# EAGLE board 1TTR4--- Cumbo.Fabio --- LED Simple (EAGLE 7.7.0)
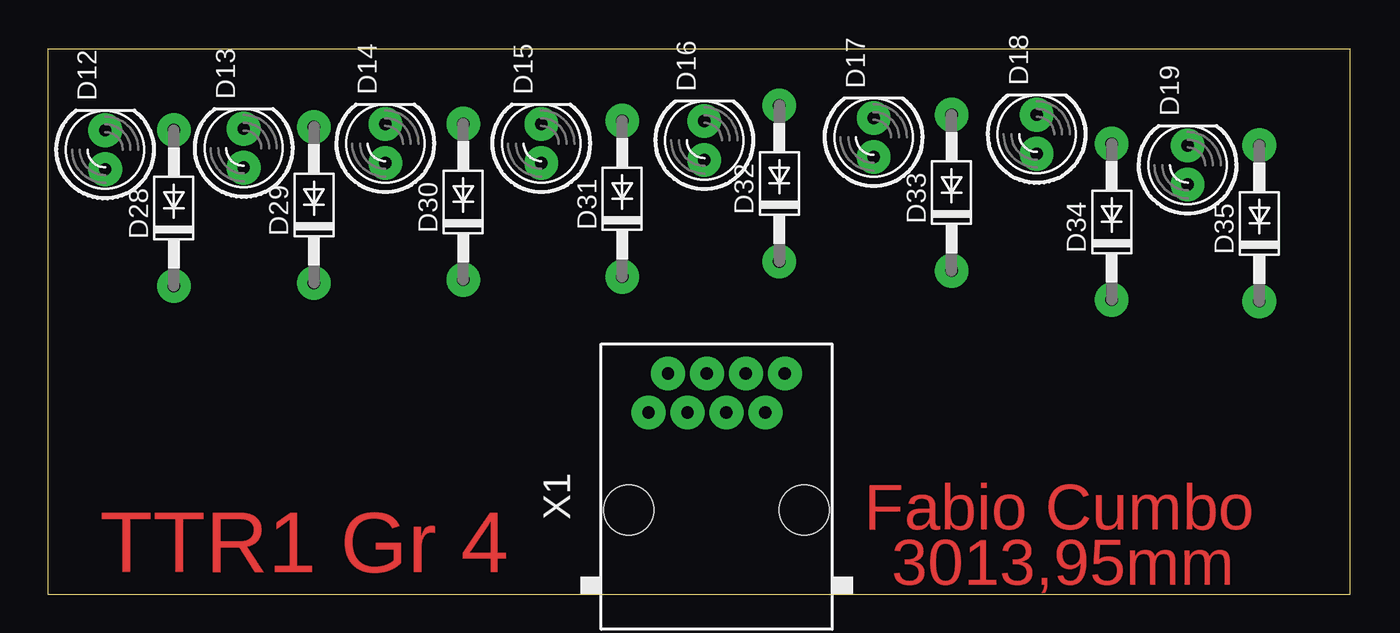
[diagram p0: board, top side]
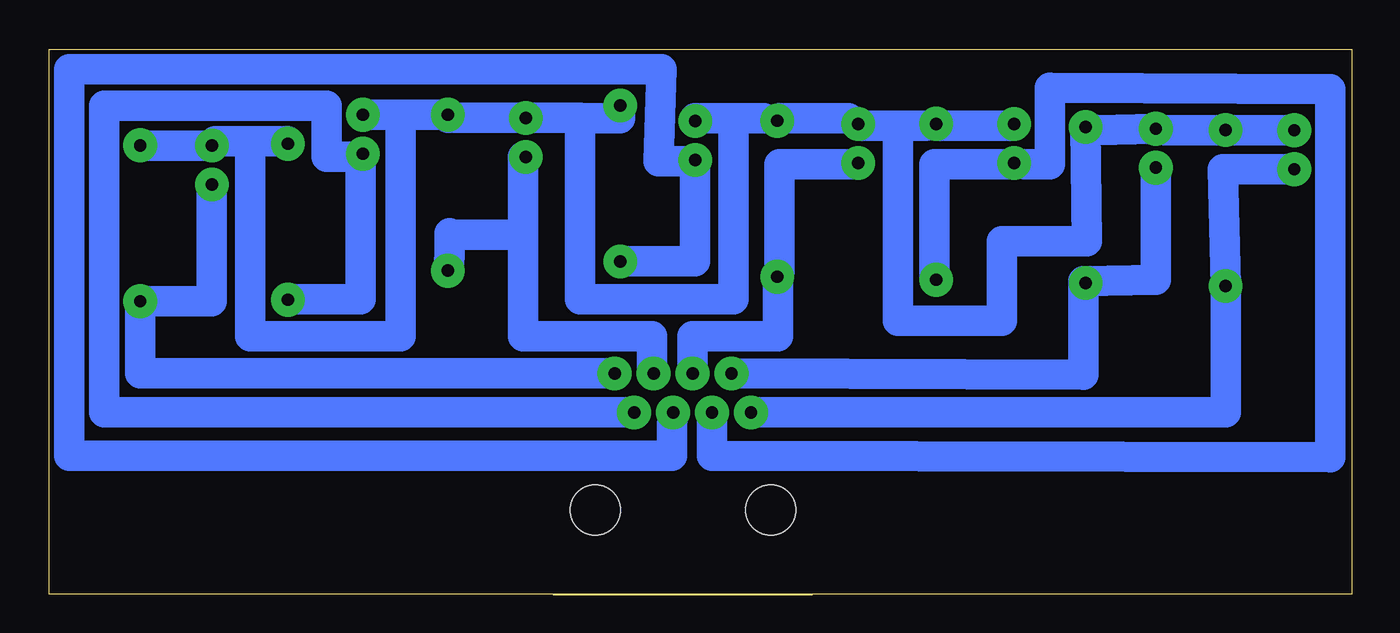
[diagram p1: board, bottom side, seen from below]

Size 84.9 x 35.53 mm. Coordinates in mm from the lower left corner, seen from the top.
Outline: 0,0.03 84.9,0.03 84.9,35.53 0,35.53 0,0.03
Copper layers (1*16): Top 0.035mm / dielectric 1.5mm / Bottom 0.035mm
Design rules "default": minimum track width 10mil, minimum drill 24mil, track to track 8mil, track to pad 8mil, pad to pad 8mil, via to via 8mil, smd to smd 8mil, copper to edge 40mil, drill to drill 8mil, minimum pad ring 10mil, minimum via ring 8mil, stop-mask expansion 4mil, vias tented up to drill 0mil, thermal gap 10mil
Net classes: 0 default: width 2 mm, drill 0.8 mm, clearance 0.2 mm

## Footprints (pad centres in the part's own frame; a part is rotated, then mirrored left to right if it is on the bottom)
LED5MM = drill 0.8 pad 2.2: A -1.27,0; K 1.27,0
DO41-10 = drill 0.8 pad 2.2: A 5.08,0; C -5.08,0
RJ45-NO-SHIELD = drill 0.8 pad 2.2: 1 -4.445,6.35; 2 -3.175,8.89; 3 -1.905,6.35; 4 -0.635,8.89; 5 0.635,6.35; 6 1.905,8.89; 7 3.175,6.35; 8 4.445,8.89 | hole 3.251: -5.715,0; 5.715,0

## Placement (x,y rotation side)
D12  [LED5MM]  3.75,28.98 90 top
D13  [LED5MM]  12.78,29.08 90 top
D14  [LED5MM]  22.01,29.38 90 top
D15  [LED5MM]  32.17,29.38 90 top
D16  [LED5MM]  42.8,29.58 90 top
D17  [LED5MM]  53.83,29.78 90 top
D18  [LED5MM]  64.46,29.98 90 top
D19  [LED5MM]  74.29,27.98 90 top
D28  1N4004  [DO41-10]  8.23,25.18 90 top
D29  1N4004  [DO41-10]  17.36,25.38 90 top
D30  1N4004  [DO41-10]  27.09,25.58 90 top
D31  1N4004  [DO41-10]  37.45,25.78 90 top
D32  1N4004  [DO41-10]  47.68,26.78 90 top
D33  1N4004  [DO41-10]  58.91,26.18 90 top
D34  1N4004  [DO41-10]  69.34,24.28 90 top
D35  1N4004  [DO41-10]  78.97,24.18 90 top
X1  RJ45-6L-B  [RJ45-NO-SHIELD]  43.6,5.51 0 top

## Library data of the parts
D12-D19 = led
D28-D35 = diode
X1 = con-tycoelectronics; MPN: RJ45-6L-B; OC_FARNELL: unknown; OC_NEWARK: 16R6090

## Nets
N$1: D12.A D28.C X1.1
N$2: D12.K D13.K D14.K D15.K D16.K D17.K D18.K D19.K D28.A D29.A D30.A D31.A D32.A D33.A D34.A D35.A
N$3: D13.A D29.C X1.2
N$4: D14.A D30.C X1.3
N$5: D15.A D31.C X1.4
N$6: D16.A D32.C X1.5
N$7: D17.A D33.C X1.6
N$8: D18.A D34.C X1.7
N$9: D19.A D35.C X1.8

## Tracks (layer width: path | path; a pad name or v marks a point on that pad's centre or on a via)
N$1
  Bottom 2: D12.A 8.43,27.71 D28.C 8.23,11.86 X1.1
N$2
  Bottom 2: D14.K 22.3,30.53 26.8,30.53 D30.A 27.8,30.53 29.6,30.53 | 29.6,30.53 31.8,30.53 D15.K 32.8,31.03 37.3,31.03 D31.A 38.3,31.03 40.3,31.03 | 40.3,31.03 42.8,31.03 D16.K | 40.3,31.03 40.3,19.23 50.3,19.23 50.3,31.03 | 50.3,31.03 50.3,31.05 D17.K 58.91,31.05 D33.A | 29.6,30.53 29.6,17.83 22.8,17.83 22.8,23.03 17.26,23.03 D29.A 16.66,30.25 D13.K 12.18,30.26 D28.A 7.03,30.25 D12.K | 62,31.25 62,16.83 71.8,16.83 71.8,29.53 | D33.A 59,31.26 | 47.8,31.86 D32.A 47.68,31.03 50.3,31.03 | D18.K 62,31.25 | 62,31.25 D33.A | D34.A 69.34,29.53 71.8,29.53 | 71.8,29.53 74.09,29.53 D19.K D35.A
N$3
  Bottom 2: D29.C 17.5,20.4 | 17.5,20.4 17.5,14.33 40.42,14.43 X1.2 | 17.5,20.4 12.78,20.5 D13.A
N$4
  Bottom 2: D30.C 27.2,20.53 27.2,28.03 22.3,28.03 D14.A 21.3,28.03 19.7,28.03 19.7,33.03 1.4,32.93 1.4,8.93 41.7,9.03 X1.3
N$5
  Bottom 2: D15.A 32.3,28.03 37.3,28.03 37.3,21.03 D31.C 37.4,20.7 37.4,16.83 42.96,16.83 X1.4
N$6
  Bottom 2: X1.5 44.3,11.03 44.3,9.03 83.6,9.03 83.6,34.23 45,34.23 45.2,28.23 42.8,28.23 D16.A 42.8,21.7 D32.C
N$7
  Bottom 2: 58.8,23.43 58.8,22.03 D33.C | D17.A 54,28.51 54,23.43 | 54,23.43 58.8,23.43 | 58.8,23.43 58.8,23.53 | X1.6 45.6,14.4 45.6,16.83 54,16.83 54,23.43
N$8
  Bottom 2: D34.C 69.34,19.23 64.6,19.23 64.6,28.71 D18.A 64.8,28.53 66.8,28.53 66.8,31.83 81.3,31.83 81.3,11.86 X1.7
N$9
  Bottom 2: D19.A 74.29,19.1 D35.C 78.97,14.4 X1.8

## Text on the board
Top: Fabio Cumbo | TTR1 Gr 4 | 3013,95mm